# Altium PCB M2FS FLS Data Formatter 8_14_2012 centroid.PcbDoc (part 3 of 3)
Units mil, origin at the board's own origin, x right, y up, seen from the top; angles counter-clockwise.
Board outline 3350 x 3370 mil, 8 copper layers (Top Layer, Internal Plane 1, Mid-Layer 1, Mid-Layer 2, MidLayer3, Mid-Layer 4, Internal Plane 2, Bottom Layer); 141 components, 138 nets, 814 pads, 61 vias.
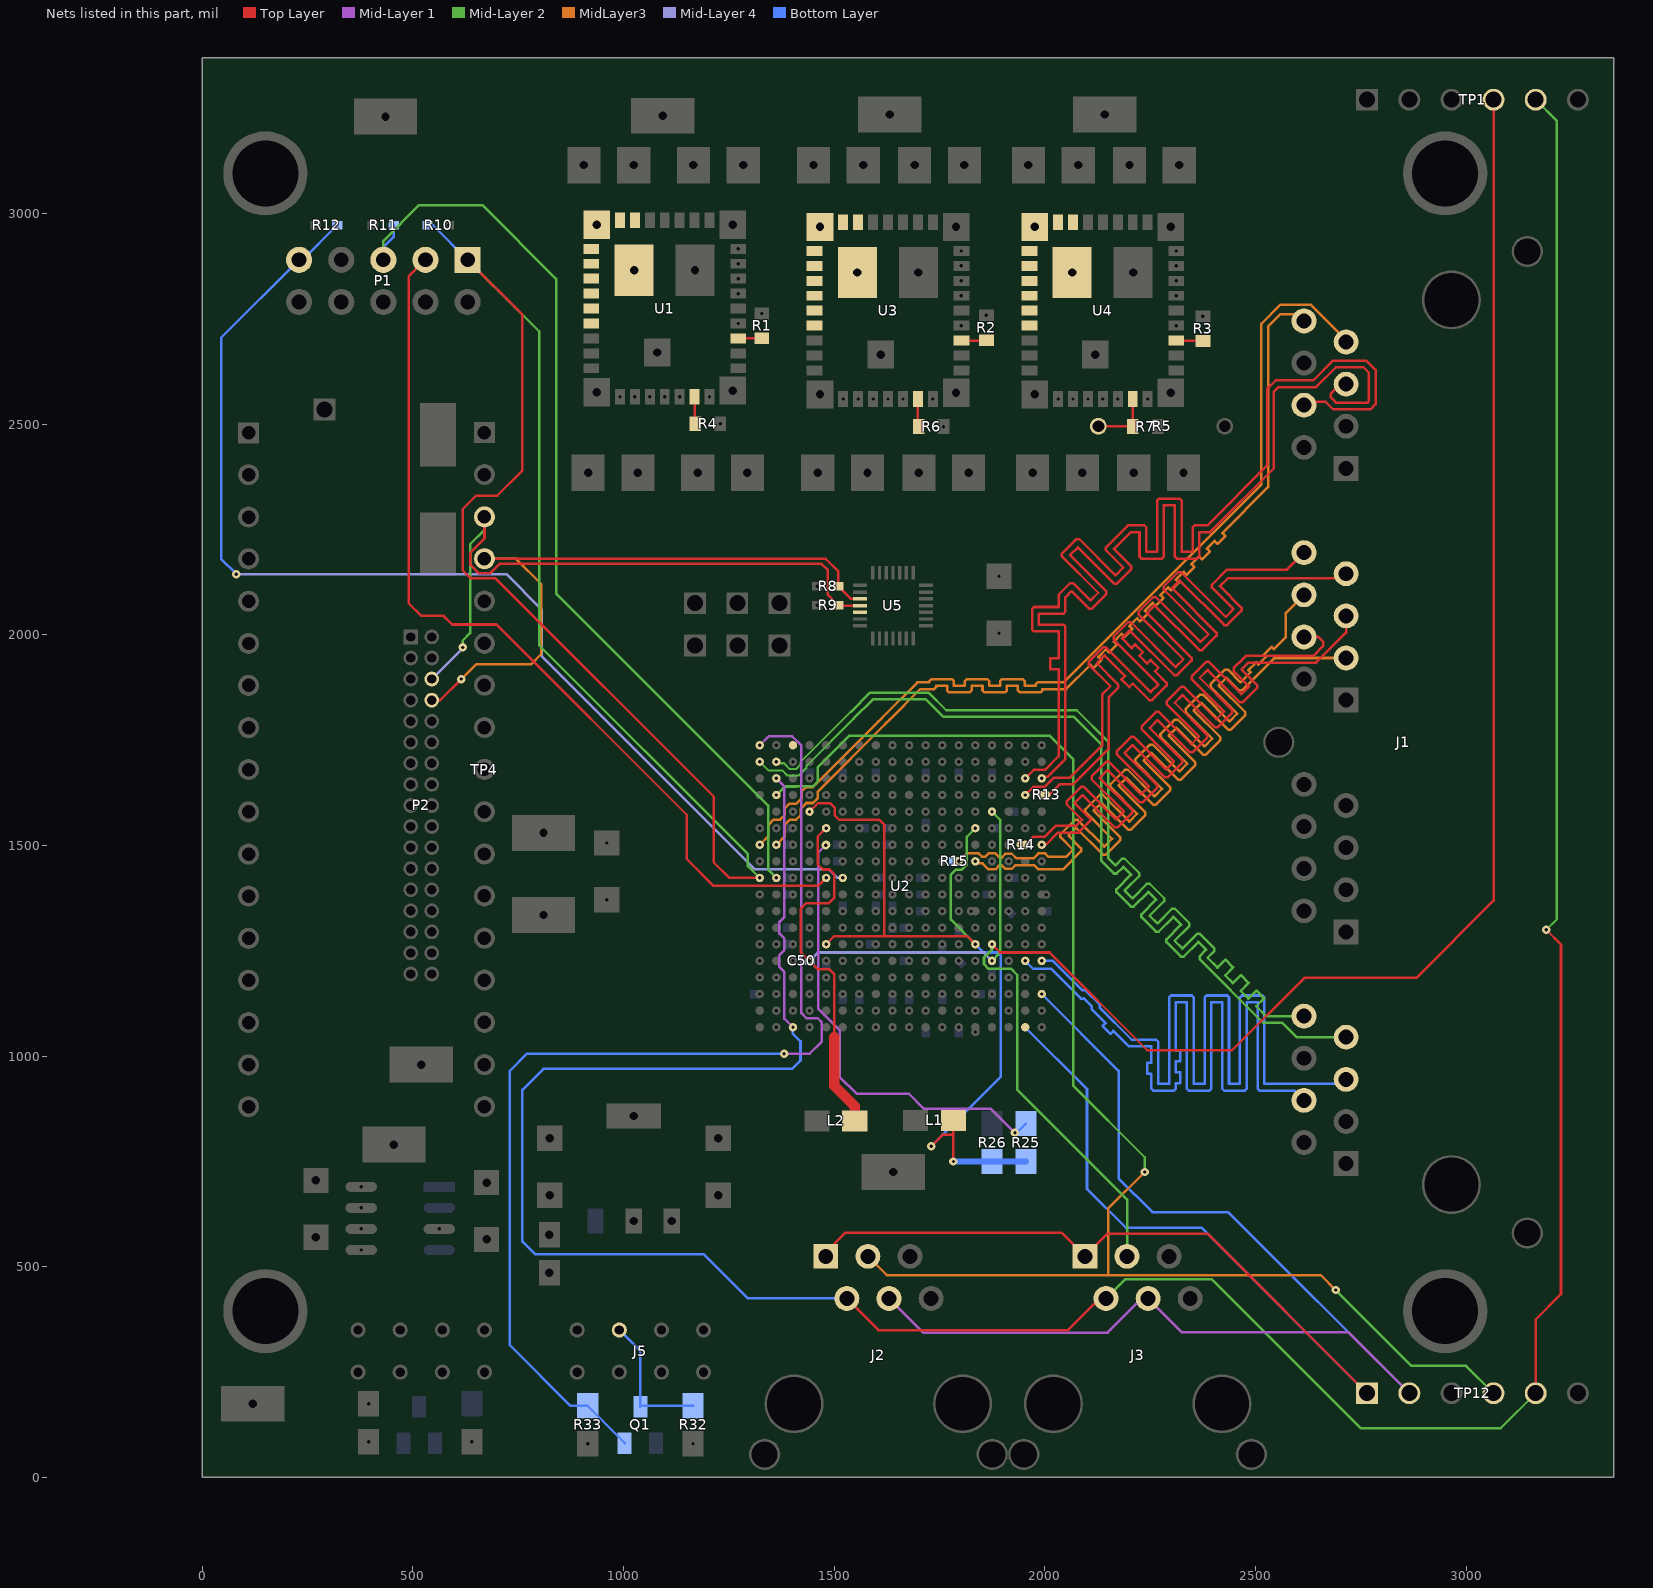
[diagram p9: the nets of this part, all layers, seen from the top]

## Via types
v1: diameter 20, hole 8, Top Layer to Bottom Layer, 60 vias
v2: diameter 20, hole 8, Top Layer to Bottom Layer, tented bottom, 1 vias

## Nets (pads, with @x,y where several pads share a name; then routed paths per layer and width w, separated by ;. In a path a pad name is that pad's centre, name@x,y a point inside that pad or via, vN(x,y) a via of type N, cw(c..) or ccw(c..) an arc to the next point about the centre after c; other vN are vias at no path point) (continued)
LVDS_CHANNEL_6_N: J1.C3 U2.H14 | length 2300.3
  MidLayer3 w6: U2.H14@1835.17,1462.37 1839.85,1457.68 1852.35,1457.68 1866.67,1443.37 1882.41,1443.37 1892.56,1453.53 1897.29,1453.53 1906.45,1444.37 1921.36,1444.37 1930.52,1453.53 1974.62,1453.53 1984.78,1443.37 2043,1443.37 2086.23,1486.6 2086.23,1493.23 2056.17,1523.29 2074.55,1541.67 2137.99,1478.24 2144.61,1478.24 2179,1512.62 2179,1519.25 2115.56,1582.69 2133.95,1601.07 2197.38,1537.63 2204.01,1537.63 2238.4,1572.02 2238.4,1578.65 2174.96,1642.08 2193.34,1660.47 2256.78,1597.03 2263.41,1597.03 2297.79,1631.42 2297.79,1638.04 2234.36,1701.48 2252.74,1719.86 2316.18,1656.43 2322.81,1656.43 2357.19,1690.81 2357.19,1697.44 2293.75,1760.88 2312.14,1779.26 2375.58,1715.82 2382.2,1715.82 2416.59,1750.21 2416.59,1756.84 2353.15,1820.27 2371.54,1838.66 2434.97,1775.22 2441.6,1775.22 2475.98,1809.61 2475.98,1816.23 2412.55,1879.67 2430.93,1898.06 2460.99,1867.99 2467.62,1867.99 2544.63,1945 J1.C3@2715,1945
LVDS_CHANNEL_6_P: J1.C6 R15.2 U2.H13 | length 2374
  MidLayer3 w6: U2.H13@1795.8,1462.37 1814.64,1481.21 1842.97,1481.21 1850.5,1473.68 1858.98,1473.68 1866.67,1481.37 1882.41,1481.37 1894.25,1469.53 1895.61,1469.53 1906.45,1480.37 1921.36,1480.37 1932.2,1469.53 1972.93,1469.53 1984.78,1481.37 2000.52,1481.37 2008.94,1472.94 2049.94,1472.94 2066.91,1489.91 2036.85,1519.98 2036.85,1526.6 2071.24,1560.99 2077.86,1560.99 2141.3,1497.55 2159.69,1515.94 2096.25,1579.37 2096.25,1586 2130.63,1620.38 2137.26,1620.38 2200.7,1556.95 2219.08,1575.33 2155.65,1638.77 2155.65,1645.4 2190.03,1679.78 2196.66,1679.78 2260.1,1616.34 2278.48,1634.73 2215.04,1698.17 2215.04,1704.79 2249.43,1739.18 2256.05,1739.18 2319.49,1675.74 2337.88,1694.13 2274.44,1757.56 2274.44,1764.19 2308.82,1798.58 2315.45,1798.58 2378.89,1735.14 2397.27,1753.52 2333.84,1816.96 2333.84,1823.59 2368.22,1857.97 2374.85,1857.97 2438.29,1794.54 2456.67,1812.92 2393.23,1876.36 2393.23,1882.98 2427.62,1917.37 2434.25,1917.37 2464.31,1887.31 2488.19,1911.19 2483.24,1916.14 2501.63,1934.53 2506.58,1929.58 2524.96,1947.96 2520.01,1952.91 2538.4,1971.3 2543.35,1966.35 2572,1995 2572,2052 J1.C6@2615,2095
  Bottom Layer w6: R15.2@1785.17,1462.37 U2.H13@1795.8,1462.37
LVDS_CHANNEL_7_N: J1.C5 U2.G18 | length 2294.7
  Top Layer w6: U2.G18@1992.65,1501.74 2002.55,1501.74 2031.3,1530.49 2080.12,1530.49 2107.43,1557.8 2107.43,1564.43 2070.69,1601.17 2089.07,1619.56 2165.87,1542.76 2172.5,1542.76 2206.88,1577.14 2206.88,1583.77 2130.08,1660.57 2148.47,1678.96 2225.27,1602.15 2231.9,1602.15 2266.28,1636.54 2266.28,1643.17 2189.48,1719.97 2207.86,1738.35 2284.67,1661.55 2291.29,1661.55 2325.68,1695.94 2325.68,1702.56 2248.88,1779.36 2267.26,1797.75 2344.06,1720.95 2350.69,1720.95 2385.08,1755.33 2385.08,1761.96 2308.27,1838.76 2326.66,1857.15 2403.46,1780.34 2410.09,1780.34 2444.47,1814.73 2444.47,1821.36 2367.67,1898.16 2386.06,1916.54 2462.86,1839.74 2469.48,1839.74 2503.87,1874.13 2503.87,1880.75 2467.13,1917.5 2483.63,1934 2644,1934 2715,2005 J1.C5@2715,2045
LVDS_CHANNEL_7_P: J1.C4 R14.2 U2.G17 | length 2297.8
  Top Layer w6: R14.2@1942.65,1501.74 U2.G17@1953.28,1501.74 1972.54,1521 2000,1521 2025.49,1546.49 2073.49,1546.49 2088.12,1561.12 2051.37,1597.86 2051.37,1604.49 2085.76,1638.87 2092.38,1638.87 2169.19,1562.07 2187.57,1580.46 2110.77,1657.26 2110.77,1663.88 2145.15,1698.27 2151.78,1698.27 2228.58,1621.47 2246.97,1639.85 2170.17,1716.65 2170.17,1723.28 2204.55,1757.67 2211.18,1757.67 2287.98,1680.86 2306.36,1699.25 2229.56,1776.05 2229.56,1782.68 2263.95,1817.06 2270.58,1817.06 2347.38,1740.26 2365.76,1758.65 2288.96,1835.45 2288.96,1842.08 2323.34,1876.46 2329.97,1876.46 2406.77,1799.66 2425.16,1818.04 2348.36,1894.84 2348.36,1901.47 2382.74,1935.86 2389.37,1935.86 2466.17,1859.06 2484.56,1877.44 2447.81,1914.18 2447.81,1920.81 2471.19,1944.19 2477,1950 2637.37,1950 2660.37,1973 2660.37,1984 2649.37,1995 J1.C4@2615,1995
LVDS_CHANNEL_8_N: J1.C7 R13.1 U2.D18 | length 2295.6
  Top Layer w6: U2.D18@1992.65,1619.85 R13.1@2003,1619.85 2010,1619.85 2035.15,1645 2066.63,1645 2152,1730.37 2152,1852 2174.63,1874.63 2174.63,1881.25 2123.21,1932.67 2141.6,1951.06 2190.23,1902.42 2181.89,1894.08 2200.27,1875.69 2208.61,1884.04 2247.74,1844.91 2254.37,1844.91 2288.75,1879.29 2288.75,1885.92 2261.18,1913.5 2269.52,1921.84 2251.14,1940.23 2242.79,1931.88 2224.41,1950.27 2232.75,1958.61 2214.37,1977 2206.02,1968.65 2182.61,1992.07 2200.99,2010.45 2307.14,1904.31 2313.77,1904.31 2348.15,1938.69 2348.15,1945.32 2242.01,2051.47 2260.39,2069.85 2366.54,1963.7 2373.16,1963.7 2407.55,1998.09 2407.55,2004.72 2301.4,2110.86 2319.79,2129.25 2425.93,2023.1 2432.56,2023.1 2466.95,2057.49 2466.95,2064.11 2415.53,2115.53 2434.31,2134.31 2704.31,2134.31 J1.C7@2715,2145
LVDS_CHANNEL_8_P: J1.C8 U2.D17 | length 2184.9
  Top Layer w6: U2.D17@1953.28,1619.85 1972.43,1639 1999.52,1639 2021.52,1661 2060,1661 2136,1737 2136,1858.63 2155.31,1877.94 2103.9,1929.36 2103.9,1935.98 2138.28,1970.37 2144.91,1970.37 2251.06,1864.22 2269.44,1882.61 2163.29,1988.75 2163.29,1995.38 2197.68,2029.77 2204.31,2029.77 2310.45,1923.62 2328.84,1942.01 2222.69,2048.15 2222.69,2054.78 2257.08,2089.16 2263.7,2089.16 2369.85,1983.02 2388.23,2001.4 2282.09,2107.55 2282.09,2114.18 2316.47,2148.56 2323.1,2148.56 2429.25,2042.41 2447.63,2060.8 2396.22,2112.22 2396.22,2118.84 2432.37,2155 2575,2155 J1.C8@2615,2195
NetJ1_3: 
NetJ1_4: 
NetJ1_5: 
NetJ1_6: 
NetJ3_3: 
NetJ3_4: 
NetJ3_5: 
NetJ3_6: 
NetL1_2: C50.1 L2.2 U2.E15 U2.F5 U2.P4 U2.P15 | length 1681
  Top Layer w6: U2.F5@1480.83,1541.11 1461,1521.28 1461,1455.33 1473.33,1443 1488.83,1443 1499.83,1432 1499.83,1375.76 1487.33,1363.26 1433.59,1363.26 1422.46,1352.13 1422.46,1351.37 1421.09,1350 1421.09,1246.52 U2.P4@1441.46,1226.15 1461.83,1205.78 1488.7,1205.78 1500,1194.48 1500,1045
  Top Layer w25: 1500,1045 1500,930 1549,881 L2.2@1549,846.31
  Mid-Layer 2 w6: U2.P15@1874.54,1226.15 1894,1245.61 1894,1561.02 U2.E15@1874.54,1580.48
  Mid-Layer 4 w6: U2.P4@1441.46,1226.15 1461.32,1246 1854.68,1246 U2.P15@1874.54,1226.15
NetL2_2: L1.2 R25.2 R26.2 U2.E4 U2.F14 U2.N5 U2.N14 | length 2110.7
  Top Layer w6: U2.E4@1441.46,1580.48 1460.98,1600 1491,1600 1501,1590 1501,1572 1512,1561 1607,1561 1619,1549 1619,1285.52 1620,1284.52 ; U2.N5@1480.83,1265.52 1499.83,1284.52 1620,1284.52 ; v1(1730,786) 1757,813 1782,813 1783,814 ; v1(1783,750) 1783,814 ; L1.2@1783,847.31 1783,814 ; U2.N14@1835.17,1265.52 1816.17,1284.52 1620,1284.52
  Mid-Layer 2 w6: U2.N14@1835.17,1265.52 1776.8,1323.89 1776.8,1430.87 1787.93,1442 1802.3,1442 1814.8,1454.5 1814.8,1520.74 U2.F14@1835.17,1541.11
  Bottom Layer w6: v1(1730,786) 1895,951 1895,1239 1888,1246 1854.68,1246 U2.N14@1835.17,1265.52
  Bottom Layer w15: v1(1783,750) R26.2@1875,750 R25.2@1955,750
NetR1_1: R4.1 U1.35 | length 64.5
  Top Layer w6: U1.35@1168.7,2564.8 1168.7,2502.77 R4.1@1170.47,2501
NetR2_1: R1.1 U1.4 | length 56
  Top Layer w6: U1.4@1272.05,2703.58 1327.89,2703.58 R1.1@1328,2703.47
NetR5_1: R6.1 U3.35 | length 66.5
  Top Layer w6: U3.35@1698.58,2559.69 1698.58,2495.89 R6.1@1700.47,2494
NetR6_1: R2.1 U3.4 | length 59.5
  Top Layer w6: U3.4@1801.93,2698.47 1859.99,2698.47 R2.1@1861,2699.47
NetR8_1: R3.1 U4.4 | length 63.5
  Top Layer w6: U4.4@2311.93,2698.47 2374.01,2698.47 R3.1@2375,2697.47
NetR9_1: R5.2 R7.1 U4.35 | length 147.6
  Top Layer w6: R5.2@2127,2495 2207.47,2495 R7.1@2208.47,2494 2208.58,2494.11 U4.35@2208.58,2559.69
NRESET: U5.24
nSTATUS: R25.1 U2.G5 | length 1086.1
  Top Layer w6: v1(1480,1501) 1480.09,1501 U2.G5@1480.83,1501.74
  Mid-Layer 1 w6: v1(1480,1501) 1461.83,1482.83 1461.83,1113.17 1513,1062 1513,951 1553,911 1677,911 1713,875 1872,875 v1(1929,818)
  Bottom Layer w6: v1(1929,818) 1933,818 R25.1@1955,840
PDWN: J2.2 J3.2 TP1.5 TP12.5 U2.C2 U2.V3 | length 7631.6
  Top Layer w6: J2.2@1530,425 1605,350 2055,350 J3.2@2145,440 ; TP12.5@3165,200 3165,375 3225,435 3225,1265 v1(3190,1300)
  Mid-Layer 1 w6: U2.C2@1362.72,1659.22 1382,1639.94 1382,1330.65 1369.96,1318.62 1369.96,1291.04 1382,1279 1382,1251.91 1369.96,1239.88 1369.96,1212.04 1382,1200 1382,1088.76 U2.V3@1402.09,1068.67
  Mid-Layer 2 w6: J3.2@2145,425 2191,471 2395.53,471 2749.53,117 3082,117 TP12.5@3165,200 ; TP1.5@3165,3270 3215,3220 3215,1325 v1(3190,1300)
  Bottom Layer w6: U2.V3@1402.09,1068.67 1402.09,1052.91 1420,1035 1420,990 1400,970 810,970 760,920 760,560 790,530 1190,530 1295,425 J2.2@1530,425
PH1: U1.17 U1.18 U1.19 U1.20 U1.21 U1.22 U1.23 U1.24 U1.25 U1.39
PH2: U3.17 U3.18 U3.19 U3.20 U3.21 U3.22 U3.23 U3.24 U3.25 U3.39
PH3: U4.17 U4.18 U4.19 U4.20 U4.21 U4.22 U4.23 U4.24 U4.25 U4.39
PLL_LOCK_A: J2.3 TP12.4 U2.D2 | length 3755.9
  Mid-Layer 2 w6: U2.D2@1362.72,1619.85 1382.87,1640 1410,1640 1410.22,1640.22 1449.33,1640.22 1460.46,1651.35 1460.46,1685 1535.46,1760 2012,1760 2067,1705 2067,930 2237,760 v1(2237,725) ; v1(2690,445) 2870,265 3000,265 TP12.4@3065,200
  MidLayer3 w6: J2.3@1580,525 1625,480 2150,480 ; v1(2237,725) 2150,638 2150,480 ; v1(2690,445) 2655,480 2150,480
PLL_LOCK_B: J3.3 TP1.4 U2.N15 | length 4248.2
  Top Layer w6: U2.N15@1874.54,1265.52 1894.05,1246 2011.05,1246 2243.05,1014 2444,1014 2616,1186 2882,1186 3065,1369 TP1.4@3065,3270
  Mid-Layer 2 w6: U2.N15@1874.54,1265.52 1874.54,1253.02 1855.54,1234.02 1855.54,1218.28 1866.67,1207.15 1920.41,1207.15 1934.28,1193.28 1934.28,920.72 2195,660 J3.3@2195,540
SCL: P2.8 R8.1 TP4.4 U5.26 | length 1582.4
  Top Layer w6: P2.8@545,1845 565,1845 v1(615,1895) ; v1(670,2180) TP4.4@670,2180.59 1479.41,2180.59 1510,2150 R8.1@1510,2115 1539.59,2085.41 U5.26@1561.43,2085.41
  MidLayer3 w6: v1(615,1895) 650,1930 780,1930 805,1955 805,2120 745,2180 v1(670,2180)
SDA: P2.6 R9.2 TP4.3 U5.25 | length 1582.5
  Top Layer w6: TP4.3@670,2280 670,2228.67 636,2194.67 636,2166.51 655.92,2146.59 684.08,2146.59 706.08,2168.59 1470,2168.59 1485,2153.59 1485,2095 R9.2@1510,2070 1510.59,2069.41 U5.25@1561.43,2069.41
  Mid-Layer 2 w6: v1(618,1970) 618,1986 636,2004 636,2215 670,2249 TP4.3@670,2280
  Mid-Layer 4 w6: P2.6@545,1895 618,1968 v1(618,1970)
START_A_N: J1.A7 U2.B1 | length 2332.9
  Mid-Layer 2 w5: U2.B1@1323.35,1698.59 1343.72,1678.22 1376.5,1678.22 1388.63,1666.09 1415.56,1666.09 1434.59,1685.13 1434.59,1689.59 1546.29,1801.29
  Mid-Layer 2 w6: 1546.29,1801.29 1592,1847 1717.37,1847 1759.37,1805 2069,1805 2134,1740 2134,1463.37 2163.88,1433.49 2170.51,1433.49 2186.28,1449.27 2204.67,1430.89 2169.8,1396.02 2169.8,1389.39 2204.18,1355.01 2210.81,1355.01 2245.68,1389.88 2264.07,1371.49 2229.2,1336.62 2229.2,1329.99 2263.58,1295.61 2270.21,1295.61 2305.08,1330.48 2323.46,1312.09 2288.59,1277.22 2288.59,1270.6 2322.98,1236.21 2329.61,1236.21 2364.48,1271.08 2382.86,1252.7 2367.08,1236.92 2367.08,1230.29 2518.37,1079 2563.63,1079 2597.63,1045 J1.A7@2715,1045
START_A_P: J1.A8 U2.B2 | length 2334.1
  Mid-Layer 2 w5: U2.B2@1362.72,1698.59 1366.2,1695.11 1380.82,1695.11 1394.85,1681.09 1409.34,1681.09 1419.59,1691.34 1419.59,1697.22 1539.37,1817
  Mid-Layer 2 w6: 1539.37,1817 1585.37,1863 1724,1863 1766,1821 2075.63,1821 2150,1746.63 2150,1470 2167.19,1452.81 2182.97,1468.59 2189.6,1468.59 2223.98,1434.2 2223.98,1427.57 2189.11,1392.7 2207.5,1374.32 2242.37,1409.19 2248.99,1409.19 2283.38,1374.8 2283.38,1368.18 2248.51,1333.31 2266.89,1314.92 2301.76,1349.79 2308.39,1349.79 2342.78,1315.41 2342.78,1308.78 2307.91,1273.91 2326.29,1255.52 2361.16,1290.39 2367.79,1290.39 2402.17,1256.01 2402.17,1249.38 2386.4,1233.6 2409.69,1210.31 2428.5,1229.12 2446.89,1210.73 2428.08,1191.92 2446.46,1173.54 2465.27,1192.35 2483.66,1173.96 2464.85,1155.15 2483.23,1136.77 2502.04,1155.58 2520.43,1137.19 2501.62,1118.38 2525,1095 J1.A8@2615,1095
START_B_N: J1.D7 U2.G1 | length 2300.1
  MidLayer3 w6: U2.G1@1325.61,1506.11 1323.35,1506.11 U2.G1@1323.35,1501.74 1343.72,1522.11 1343.72,1548.98 1355.92,1561.18 1371.78,1561.18 1383.09,1572.49 1383.09,1588.35 1394.22,1599.48 1410.09,1599.48 1422.46,1611.86 1422.46,1627.72 1433.59,1638.85 1449.45,1638.85 1605,1794.4 1605,1794.5 1625.5,1815 1625.6,1815 1697.6,1887 1726,1887 1726,1890.06 1730.69,1894.75 1779.31,1894.75 1784,1890.06 1784,1879.25 1810,1879.25 1810,1890.06 1814.69,1894.75 1863.31,1894.75 1868,1890.06 1868,1879.25 1894,1879.25 1894,1890.06 1898.69,1894.75 1947.31,1894.75 1952,1890.06 1952,1879.25 1978,1879.25 1978,1882.31 1982.69,1887 2044,1887 2514,2357 2514,2738.35 2559.17,2783.53 2630.96,2783.53 2715,2699.49 J1.D7@2715,2695
START_B_P: J1.D8 U2.G2 | length 2295.4
  MidLayer3 w6: U2.G2@1362.72,1501.74 1383.09,1522.11 1383.09,1549.86 1394.71,1561.48 1409.96,1561.48 1421.09,1572.61 1421.09,1587.86 1434.08,1600.85 1449.33,1600.85 1460.46,1611.98 1460.46,1627.23 1621,1787.77 1621,1787.87 1632.13,1799 1632.23,1799 1704.23,1871 1737.31,1871 1742,1875.69 1742,1878.75 1768,1878.75 1768,1867.94 1772.69,1863.25 1821.31,1863.25 1826,1867.94 1826,1878.75 1852,1878.75 1852,1867.94 1856.69,1863.25 1905.31,1863.25 1910,1867.94 1910,1878.75 1936,1878.75 1936,1867.94 1940.69,1863.25 1989.31,1863.25 1994,1867.94 1994,1871 2050.63,1871 2108.58,1928.95 2115.79,1921.74 2134.17,1940.12 2126.96,1947.33 2145.35,1965.72 2152.56,1958.51 2170.94,1976.89 2163.73,1984.1 2182.12,2002.49 2189.33,1995.28 2207.71,2013.66 2200.5,2020.87 2218.89,2039.26 2226.1,2032.05 2244.48,2050.43 2237.27,2057.64 2255.66,2076.03 2262.87,2068.82 2281.25,2087.2 2274.04,2094.41 2292.42,2112.8 2299.64,2105.59 2318.02,2123.97 2310.81,2131.18 2329.19,2149.57 2336.41,2142.35 2354.79,2160.74 2347.58,2167.95 2365.96,2186.34 2373.18,2179.12 2391.56,2197.51 2384.35,2204.72 2402.73,2223.11 2409.95,2215.89 2428.33,2234.28 2421.12,2241.49 2530,2350.37 2530,2731.73 2559.24,2760.97 2599.03,2760.97 J1.D8@2615,2745
SYS_CLK1_N: J1.A5 U2.P18 | length 2154.7
  Bottom Layer w6: U2.P18@1992.65,1226.15 2019,1226.15 2089.03,1156.12 2089.25,1156.34 2095.88,1156.34 2130.26,1121.96 2130.26,1115.33 2130.04,1115.11 2206.15,1039 2264.31,1039 2269,1034.31 2269,934 2295,934 2295,1139.31 2299.68,1144 2348.31,1144 2353,1139.31 2353,934 2379,934 2379,1139.31 2383.68,1144 2432.31,1144 2437,1139.31 2437,934 2463,934 2463,1139.31 2467.68,1144 2516.31,1144 2521,1139.31 2521,934 2704,934 J1.A5@2715,945
SYS_CLK1_P: J1.A4 U2.P17 | length 2185.7
  Bottom Layer w6: U2.P17@1953.28,1226.15 1972.42,1207 2015.52,1207 2085.71,1136.81 2092.34,1136.81 2092.56,1137.03 2110.95,1118.64 2110.73,1118.42 2110.73,1111.8 2144.1,1078.42 2137.03,1071.35 2155.41,1052.97 2162.48,1060.04 2199.52,1023 2253,1023 2253,984 2243,984 2243,958 2253,958 2253,922.69 2257.68,918 2306.31,918 2311,922.69 2311,935.69 2321,935.69 2321,961.69 2311,961.69 2311,987.69 2321,987.69 2321,1013.69 2311,1013.69 2311,1128 2337,1128 2337,922.69 2341.68,918 2390.31,918 2395,922.69 2395,1128 2421,1128 2421,922.69 2425.68,918 2474.31,918 2479,922.69 2479,1128 2505,1128 2505,922.69 2509.68,918 2592,918 J1.A4@2615,895
SYS_CLK2_N: J1.D5 U2.C18 | length 2594.5
  Top Layer w6: U2.C18@1992.65,1659.22 1997.02,1663.59 2007.14,1663.59 2048.93,1705.37 2048.93,2019.31 2044.24,2024 1985.73,2024 1985.73,2050 2044.24,2050 2048.93,2054.69 2048.93,2088.93 2063.55,2103.55 2104.93,2062.18 2111.56,2062.18 2145.94,2096.56 2145.94,2103.19 2059.88,2189.25 2078.26,2207.64 2164.33,2121.57 2170.95,2121.57 2205.34,2155.96 2205.34,2162.59 2163.96,2203.96 2203.92,2243.92 2224.61,2243.92 2224.61,2185.41 2229.3,2180.72 2277.92,2180.72 2282.61,2185.41 2282.61,2307.12 2308.61,2307.12 2308.61,2185.41 2313.3,2180.72 2361.92,2180.72 2366.61,2185.41 2366.61,2243.92 2392.18,2243.92 2543.63,2395.38 2543.63,2577 2554.63,2588 2643.63,2588 2690.63,2635 2756,2635 2769,2622 2769,2554 2766,2551 2691,2551 2678,2564 2678,2572 2701,2595 J1.D5@2715,2595
SYS_CLK2_P: J1.D4 U2.C17 | length 2748.1
  Top Layer w6: U2.C17@1953.28,1659.22 1973.65,1679.59 2000.52,1679.59 2032.93,1712 2032.93,1918 2012.43,1918 2012.43,1944 2032.93,1944 2032.93,2008 1974.41,2008 1969.73,2012.69 1969.73,2061.31 1974.41,2066 2032.93,2066 2032.93,2095.55 2060.24,2122.87 2066.87,2122.87 2108.24,2081.49 2126.63,2099.88 2040.56,2185.94 2040.56,2192.57 2074.95,2226.95 2081.57,2226.95 2167.64,2140.89 2186.02,2159.27 2144.65,2200.65 2144.65,2207.28 2197.3,2259.92 2235.92,2259.92 2240.61,2255.24 2240.61,2196.72 2266.61,2196.72 2266.61,2318.44 2271.3,2323.12 2319.92,2323.12 2324.61,2318.44 2324.61,2196.72 2350.61,2196.72 2350.61,2255.24 2355.3,2259.92 2385.55,2259.92 2527.63,2402 2527.63,2583.63 2548,2604 2637,2604 2684,2651 2762.63,2651 2785,2628.63 2785,2547.37 2772.63,2535 2684.37,2535 2666.69,2552.69 2622.68,2552.69 J1.D4@2615,2545
T18: J2.4 J3.4 TP12.2 U2.T18 | length 2815.7
  Mid-Layer 1 w6: J2.4@1630,425 1711,344 2149,344 J3.4@2245,440 ; J3.4@2245,425 2325.5,344.5 2720.5,344.5 TP12.2@2865,200
  Bottom Layer w6: U2.T18@1992.65,1147.41 2175,965.05 2175,710 2255,630 2435,630 TP12.2@2865,200
TCK: P1.1 R10.2 U2.J1 | length 3861
  Top Layer w6: P1.1@630,2890 760,2760 760,2390 700,2330 650,2330 618,2298 618,2153.25 636.66,2134.59 695.41,2134.59 1214.18,1615.82 1214.18,1460 1251.18,1423 U2.J1@1323.35,1423
  Mid-Layer 2 w6: P1.1@630,2890 800,2720 800,1975 1295,1480 1295,1451.35 U2.J1@1323.35,1423
  Bottom Layer w6: R10.2@535,2972 548,2972 P1.1@630,2890
TDI: P1.9 R12.2 U2.J6 | length 2764.4
  Mid-Layer 4 w6: v1(81,2144) 722,2144 805.5,2060.5 805.5,1949.5 1311.63,1443.37 1487.33,1443.37 1507.7,1423 U2.J6@1520.2,1423
  Bottom Layer w6: v1(81,2144) 45,2180 45,2705 P1.9@230,2890 238,2890 R12.2@320,2972
TDO: P1.3 U2.J5 | length 2169.7
  Top Layer w6: P1.3@530,2890 490,2850 490,2075 520,2045 573,2045 593.5,2024.5 698.5,2024.5 1150,1573 1150,1468 1214,1404 1461.83,1404 U2.J5@1480.83,1423
TMS: P1.5 R11.2 U2.J2 | length 2293.6
  Mid-Layer 2 w6: P1.5@430,2890 430,2935 515,3020 665,3020 840,2845 840,2098 1343,1595 1343,1442.72 U2.J2@1362.72,1423
  Bottom Layer w6: P1.5@430,2890 430,2920 455,2945 R11.2@455,2972
V17: J2.1 J3.1 TP12.1 U2.V17 | length 2826.4
  Top Layer w6: J2.1@1480,525 1480,534 1527,581 2039,581 J3.1@2095,525 2149,579 2386,579 TP12.1@2765,200
  Bottom Layer w6: U2.V17@1953.28,1068.67 2100,921.94 2100,685 2192,593 2372,593 TP12.1@2765,200
Vs: U2.A3
Vsyn: J5.6 Q1.3 R32.2 | length 328.1
  Bottom Layer w6: J5.6@990,350 1040,300 Q1.3@1040,168.31 1041.69,170 R32.2@1165,170
Vsync: Q1.2 R33.2 U2.A1 | length 2644.3
  Mid-Layer 1 w6: U2.A1@1323.35,1737.96 1344.39,1759 1400.5,1759 1422,1737.5 1422,1102.05 1434.01,1090.04 1460.96,1090.04 1470,1081 1470,1034 1442,1006 v1(1381,1006)
  Bottom Layer w6: Q1.2@1002.6,81.69 1002.6,82.4 R33.2@915,170 874,170 730,314 730,965 771,1006 v1(1381,1006)
pads on no net: J1.MH1 J1.MH2 J1.MH3 J1.MH4 J1.MH5 J2.MH1 J2.MH2 J2.MH3 J2.MH4 J3.MH1 J3.MH2 J3.MH3 J3.MH4 J4.1 J4.4 J4.5 J4.8 J5.1 J5.4 J5.5 J5.8 P1.6 P1.7 P1.8 U1.2 U1.3 U1.6 U1.15 U1.16 U1.26 U1.27 U1.28 U2.A4 U2.A8 U2.A10 U2.A11 U2.A13 U2.B4 U2.B5 U2.B7 U2.B15 U2.B16 U2.B18 U2.C1 U2.C3 U2.C5 U2.C10 U2.D1 U2.D3 U2.D10 U2.E1 U2.E2 U2.E16 U2.E17 U2.E18 U2.G14 U2.H2 U2.H4 U2.H5 U2.H17 U2.K5 U2.K6 U2.L1 U2.L2 U2.L3 U2.L4 U2.L5 U2.M2 U2.M5 U2.P1 U2.P5 U2.P9 U2.P12 U2.R3 U2.R4 U2.R8 U2.R11 U2.R13 U2.T3 U2.T8 U2.T17 U2.U1 U2.U5 U2.U6 U2.U12 U2.U15 U2.U17 U2.V1 U2.V5 U2.V6 U2.V15 U2.V16 U3.2 U3.3 U3.6 U3.7 U3.15 U3.16 U3.26 U3.27 U3.28 U4.2 U4.3 U4.6 U4.15 U4.16 U4.26 U4.27 U4.28 U5.10 U5.11 U6.4

## Polygon pours and split planes (outlines as drawn)
1V2 on Multi-Layer "1V2" (solid, remove dead copper, pour order 107): 3353.06,3373.06 3354.33,3370 3354.33,0 3353.06,-3.06 3350,-4.33 0,-4.33 -3.06,-3.06 -4.33,0 -4.33,3370 -3.06,3373.06 0,3374.33 3350,3374.33
GND on Mid-Layer 4 "U2 Core GND" (solid, remove dead copper, pour order 56): 1759.49,1504.8 1760.76,1501.74 1760.76,1304.89 1759.49,1301.83 1756.43,1300.56 1559.57,1300.56 1556.51,1301.83 1555.24,1304.89 1555.24,1501.74 1556.51,1504.8 1559.57,1506.07 1756.43,1506.07
PH3 on Mid-Layer 4 "PH3" (solid, remove dead copper, pour order 71): 1915,2715 2000,2715 2000,2745 2025,2770 2130,2770 2130,2965 2085,2965 2085,3020 1915,3020
1V8 on Mid-Layer 4 "1V8" (solid, remove dead copper, pour order 100): 3353.06,3373.06 3354.33,3370 3354.33,0 3353.06,-3.06 3350,-4.33 0,-4.33 -3.06,-3.06 -4.33,0 -4.33,3370 -3.06,3373.06 0,3374.33 3350,3374.33
PH2 on Mid-Layer 4 "PH2" (solid, remove dead copper, pour order 70): 1405,2715 1490,2715 1490,2745 1515,2770 1620,2770 1620,2965 1575,2965 1575,3020 1405,3020
PH1 on Mid-Layer 4 "PH1" (solid, remove dead copper, pour order 69): 875.12,2720.12 960.12,2720.12 960.12,2750.12 985.12,2775.12 1090.12,2775.12 1090.12,2970.12 1045.12,2970.12 1045.12,3025.12 875.12,3025.12
1V8 on Mid-Layer 4 "1V8" (solid, pour order 96): 1620,2770 1770,2770 1770,2825 1840,2825 1840,3060 1750,3060 1750,3320 1505,3320 1505,3035 1645,3035 1645,2950 1620,2950.28
2V5 on Mid-Layer 4 "2V5" (solid, pour order 97): 2130,2770 2280,2770 2280,2825 2350,2825 2350,3060 2260,3060 2260,3320 2015,3320 2015,3035 2155,3035 2155,2950 2130,2950.28
1V2 on Mid-Layer 4 "1V2" (solid, remove dead copper, pour order 95): 1223.18,3328.18 1224.45,3325.12 1224.45,3069.45 1310.12,3069.45 1313.18,3068.18 1314.45,3065.12 1314.45,2830.12 1313.18,2827.06 1310.12,2825.79 1244.45,2825.79 1244.45,2775.12 1243.78,2773.51 1243.18,2772.06 1241.62,2771.41 1240.12,2770.79 1100,2770.67 1098.49,2771.3 1096.94,2771.94 1096.3,2773.48 1095.67,2775 1095.67,2955 1096.3,2956.52 1096.91,2958.04 1096.93,2958.04 1096.94,2958.06 1098.45,2958.69 1099.97,2959.33 1110.79,2959.41 1110.79,3035.79 975.12,3035.79 972.06,3037.06 970.79,3040.12 970.79,3325.12 972.06,3328.18 975.12,3329.45 1220.12,3329.45
AGND on Mid-Layer 4 "AGND" (solid, remove dead copper, pour order 98): 775,920 775,545 1300,545 1300,620 2000,620 2000,820 1855,820 1855,895 1600,895 1600,795 1300,795 1300,920
GND on Mid-Layer 1 "U2 Core GND" (solid, remove dead copper, pour order 54): 1559.57,1304.89 1559.57,1501.74 1756.43,1501.74 1756.43,1304.89 1559.57,1304.89
PH3 on Mid-Layer 1 "PH3" (solid, pour order 64): 1915,2715 2000,2715 2000,2745 2025,2770 2130,2770 2130,2965 2085,2965 2085,3020 1915,3020
GND on Mid-Layer 1 "GND" (solid, remove dead copper, pour order 84): 3353.06,3373.06 3354.33,3370 3354.33,0 3353.06,-3.06 3350,-4.33 0,-4.33 -3.06,-3.06 -4.33,0 -4.33,3370 -3.06,3373.06 0,3374.33 3350,3374.33
PH2 on Mid-Layer 1 "PH2" (solid, pour order 61): 1405,2715 1490,2715 1490,2745 1515,2770 1620,2770 1620,2965 1575,2965 1575,3020 1405,3020
PH1 on Mid-Layer 1 "PH1" (solid, pour order 58): 875.12,2720.12 960.12,2720.12 960.12,2750.12 985.12,2775.12 1090.12,2775.12 1090.12,2970.12 1045.12,2970.12 1045.12,3025.12 875.12,3025.12
1V8 on Mid-Layer 1 "1V8" (solid, pour order 81): 1620,2770 1770,2770 1770,2825 1840,2825 1840,3060 1750,3060 1750,3320 1505,3320 1505,3035 1645,3035 1645,2950 1620,2950.28
2V5 on Mid-Layer 1 "2V5" (solid, pour order 82): 2130,2770 2280,2770 2280,2825 2350,2825 2350,3060 2260,3060 2260,3320 2015,3320 2015,3035 2155,3035 2155,2950 2130,2950.28
1V2 on Mid-Layer 1 "1V2" (solid, remove dead copper, pour order 80): 1100,2775 1240.12,2775.12 1240.12,2830.12 1310.12,2830.12 1310.12,3065.12 1220.12,3065.12 1220.12,3325.12 975.12,3325.12 975.12,3040.12 1115.12,3040.12 1115.12,2955.12 1100,2955
2V5_VCCA on Mid-Layer 1 "2V5_VCCA" (solid, remove dead copper, pour order 83): 775,920 775,545 1300,545 1300,620 2000,620 2000,820 1855,820 1855,895 1600,895 1600,795 1300,795 1300,920
GND on Mid-Layer 2 "U2 Core GND" (solid, remove dead copper, pour order 55): 1559.57,1304.89 1559.57,1501.74 1756.43,1501.74 1756.43,1304.89 1559.57,1304.89
PH3 on Mid-Layer 2 "PH3" (solid, remove dead copper, pour order 65): 1915,2715 2000,2715 2000,2745 2025,2770 2130,2770 2130,2965 2085,2965 2085,3020 1915,3020
2V5 on Mid-Layer 2 "2V5" (solid, remove dead copper, pour order 89): 0,0 0,3370 3350,3370 3350,0 0,0
PH2 on Mid-Layer 2 "PH2" (solid, remove dead copper, pour order 62): 1405,2715 1490,2715 1490,2745 1515,2770 1620,2770 1620,2965 1575,2965 1575,3020 1405,3020
PH1 on Mid-Layer 2 "PH1" (solid, remove dead copper, pour order 59): 875.12,2720.12 960.12,2720.12 960.12,2750.12 985.12,2775.12 1090.12,2775.12 1090.12,2970.12 1045.12,2970.12 1045.12,3025.12 875.12,3025.12
1V8 on Mid-Layer 2 "1V8" (solid, pour order 86): 1620,2770 1770,2770 1770,2825 1840,2825 1840,3060 1750,3060 1750,3320 1505,3320 1505,3035 1645,3035 1645,2950 1620,2950.28
2V5 on Mid-Layer 2 "2V5" (solid, pour order 87): 2130,2770 2280,2770 2280,2825 2350,2825 2350,3060 2260,3060 2260,3320 2015,3320 2015,3035 2155,3035 2155,2950 2130,2950.28
1V2 on Mid-Layer 2 "1V2" (solid, remove dead copper, pour order 85): 1100,2775 1240.12,2775.12 1240.12,2830.12 1310.12,2830.12 1310.12,3065.12 1220.12,3065.12 1220.12,3325.12 975.12,3325.12 975.12,3040.12 1115.12,3040.12 1115.12,2955.12 1100,2955
AGND on Mid-Layer 2 "AGND" (solid, remove dead copper, pour order 88): 775,920 775,545 1300,545 1300,620 2000,620 2000,820 1855,820 1855,895 1600,895 1600,795 1300,795 1300,920
1V2 on Bottom Layer "1V2" (solid, remove dead copper, pour order 99): 3353.06,3373.06 3354.33,3370 3354.33,0 3353.06,-3.06 3350,-4.33 0,-4.33 -3.06,-3.06 -4.33,0 -4.33,3370 -3.06,3373.06 0,3374.33 3350,3374.33
GND on Bottom Layer "U2 Core GND" (solid, remove dead copper, pour order 53): 1559.57,1304.89 1559.57,1501.74 1756.43,1501.74 1756.43,1304.89 1559.57,1304.89
PH3 on Bottom Layer "PH3" (solid, remove dead copper, pour order 74): 1915,2715 2000,2715 2000,2745 2025,2770 2130,2770 2130,2965 2085,2965 2085,3020 1915,3020
PH2 on Bottom Layer "PH2" (solid, remove dead copper, pour order 73): 1405,2715 1490,2715 1490,2745 1515,2770 1620,2770 1620,2965 1575,2965 1575,3020 1405,3020
PH1 on Bottom Layer "PH1" (solid, remove dead copper, pour order 72): 875.12,2720.12 960.12,2720.12 960.12,2750.12 985.12,2775.12 1090.12,2775.12 1090.12,2970.12 1045.12,2970.12 1045.12,3025.12 875.12,3025.12
1V8 on Bottom Layer "1V8" (solid, pour order 101): 1620,2770 1770,2770 1770,2825 1840,2825 1840,3060 1750,3060 1750,3320 1505,3320 1505,3035 1645,3035 1645,2950 1620,2950.28
2V5 on Bottom Layer "2V5" (solid, pour order 102): 2130,2770 2280,2770 2280,2825 2350,2825 2350,3060 2260,3060 2260,3320 2015,3320 2015,3035 2155,3035 2155,2950 2130,2950.28
2V5_VCCA on Bottom Layer "2V5_VCCA" (solid, remove dead copper, pour order 103): 775,920 775,545 1300,545 1300,620 2000,620 2000,820 1855,820 1855,895 1600,895 1600,795 1300,795 1300,920
PH3 on MidLayer3 "PH3" (solid, remove dead copper, pour order 68): 1915,2715 2000,2715 2000,2745 2025,2770 2130,2770 2130,2965 2085,2965 2085,3020 1915,3020
GND on MidLayer3 "GND" (solid, remove dead copper, pour order 94): 3353.06,3373.06 3354.33,3370 3354.33,0 3353.06,-3.06 3350,-4.33 0,-4.33 -3.06,-3.06 -4.33,0 -4.33,3370 -3.06,3373.06 0,3374.33 3350,3374.33
PH2 on MidLayer3 "PH2" (solid, remove dead copper, pour order 67): 1405,2715 1490,2715 1490,2745 1515,2770 1620,2770 1620,2965 1575,2965 1575,3020 1405,3020
PH1 on MidLayer3 "PH1" (solid, remove dead copper, pour order 66): 875.12,2720.12 960.12,2720.12 960.12,2750.12 985.12,2775.12 1090.12,2775.12 1090.12,2970.12 1045.12,2970.12 1045.12,3025.12 875.12,3025.12
1V8 on MidLayer3 "1V8" (solid, pour order 91): 1620,2770 1770,2770 1770,2825 1840,2825 1840,3060 1750,3060 1750,3320 1505,3320 1505,3035 1645,3035 1645,2950 1620,2950.28
2V5 on MidLayer3 "2V5" (solid, pour order 92): 2130,2770 2280,2770 2280,2825 2350,2825 2350,3060 2260,3060 2260,3320 2015,3320 2015,3035 2155,3035 2155,2950 2130,2950.28
1V2 on MidLayer3 "1V2" (solid, remove dead copper, pour order 90): 1100,2775 1240.12,2775.12 1240.12,2830.12 1310.12,2830.12 1310.12,3065.12 1220.12,3065.12 1220.12,3325.12 975.12,3325.12 975.12,3040.12 1115.12,3040.12 1115.12,2955.12 1100,2955
2V5_VCCA on MidLayer3 "2V5_VCCA" (solid, remove dead copper, pour order 93): 775,920 775,545 1300,545 1300,620 2000,620 2000,820 1855,820 1855,895 1600,895 1600,795 1300,795 1300,920
GND on Top Layer "GND" (solid, remove dead copper, pour order 79): 3353.06,3373.06 3354.33,3370 3354.33,0 3353.06,-3.06 3350,-4.33 0,-4.33 -3.06,-3.06 -4.33,0 -4.33,3370 -3.06,3373.06 0,3374.33 3350,3374.33
PH3 on Top Layer "PH3" (solid, pour order 63): 1915,2715 2000,2715 2000,2745 2025,2770 2130,2770 2130,2965 2085,2965 2085,3020 1915,3020
PH2 on Top Layer "PH2" (solid, remove dead copper, pour order 60): 1405,2715 1490,2715 1490,2745 1515,2770 1620,2770 1620,2965 1575,2965 1575,3020 1405,3020
PH1 on Top Layer "PH1" (solid, remove dead copper, pour order 57): 875.12,2720.12 960.12,2720.12 960.12,2750.12 985.12,2775.12 1090.12,2775.12 1090.12,2970.12 1045.12,2970.12 1045.12,3025.12 875.12,3025.12
1V8 on Top Layer "1V8" (solid, pour order 76): 1620,2770 1770,2770 1770,2825 1840,2825 1840,3060 1750,3060 1750,3320 1505,3320 1505,3035 1645,3035 1645,2950 1620,2950.28
2V5 on Top Layer "2V5" (solid, pour order 77): 2130,2770 2280,2770 2280,2825 2350,2825 2350,3060 2260,3060 2260,3320 2015,3320 2015,3035 2155,3035 2155,2950 2130,2950.28
1V2 on Top Layer "1V2" (solid, pour order 75): 1100,2775 1240.12,2775.12 1240.12,2830.12 1310.12,2830.12 1310.12,3065.12 1220.12,3065.12 1220.12,3325.12 975.12,3325.12 975.12,3040.12 1115.12,3040.12 1115.12,2955.12 1100,2955
AGND on Top Layer "AGND" (solid, remove dead copper, pour order 78): 775,920 775,545 1300,545 1300,620 2000,620 2000,820 1855,820 1855,895 1600,895 1600,795 1300,795 1300,920
5V0 on Internal Plane 1 (split plane): 3329.9,20.1 20.1,20.1 20.1,3349.9 3329.9,3349.9
GND on Internal Plane 2 (split plane): 3329.9,20.1 20.1,20.1 20.1,3349.9 3329.9,3349.9

## Keep-outs
Keep-Out Layer:
  lines w18: 0,0 0,3375 3,3372 3351,3372 3352,3371 3352,-2 3350,0 0,0

## Other copper
Top Layer:
  text "GND" at 95,3240 h60
Mid-Layer 1:
  text "GND" at 95,3240 h60
Mid-Layer 2:
  text "2V5" at 95,3240 h60
MidLayer3:
  text "GND" at 95,3240 h60
Mid-Layer 4:
  text "1V8" at 95,3240 h60
Bottom Layer:
  text "1V2" at 255,3240 h60

## Silkscreen, mask and mechanical layers (free items; w line width, h text height)
Top Overlay:
  lines w5: 862,500 1290,500
  lines w6: 2630,270 2630,235 2730,235 ; 2630,3185 2645,3200 2715,3200 2750,3200 ; 2780,3085 2865,3170 2940,3245 ; 2785,3180 2845,3240 ; 2820,280 2855,280 2860,275 2860,235 ; 2825,335 2865,295 2940,220 ; 2925,220 2940,220 ; 2930,3245 2940,3245 ; 2940,235 2940,220 ; 2940,3235 2940,3245 ; 2750,3200 2765,3215 ; 2750,3200 2765,3215 ; 2750,3200 2765,3215 ; 2765,3215 2765,3235 2765,3215
  lines w7.87: 1283.98,1029.3 1283.98,1360.98 ; 1283.98,1393.02 1283.98,1777.33 1408.67,1777.33 1409,1777 ; 1440,1777 1545,1777 ; 1574,1777 1629,1777 ; 1654,1777 1667,1777 ; 1692,1777 2031.69,1777 2032.02,1777.33
  lines w8: 180,2940 385,2940 385,2930 474,2930 ; 475,2930 475,2940 680,2940
  lines w10: -295.99,60 -275.99,0 ; -295.99,3310 -275.99,3370 ; -285.99,0 -265.99,0 ; -285.99,3370 -265.99,3370 ; -275.99,1404.09 -275.99,0 ; -275.99,1965.91 -275.99,3370 ; -255.99,60 -275.99,0 ; -255.99,3310 -275.99,3370 ; 0,-124.01 0,-104.01 ; 60,-134.01 0,-114.01 ; 60,-94.01 0,-114.01 ; 1394.09,-114.01 0,-114.01 ; 1955.91,-114.01 3350,-114.01 ; 3290,-134.01 3350,-114.01 ; 3290,-94.01 3350,-114.01 ; 3350,-124.01 3350,-104.01
  text "FLS DATA FORMATTER" at 2010,3300 h36
  text "M2FS: MICHIGAN MAGELLAN FIBER SPECTROGRAPH" at 370,3295 h36
  text "1V2" at 887,3215 h40
  text "1V8" at 1423,3215 h40
  text "2V5" at 1930,3215 h40
  text "GND" at 525,3205 h40
  text "PDWN" at 3145,3195 h36 r270
  text "DTP" at 3250,3195 h36 r270
  text "PLL_B" at 3070,3190 h36 r270
  text "IO7" at 2585,3135 h36
  text "IO9" at 2720,3135 h36
  text "EOS_B" at 2630,3030 h36
  text "CAM_CLKA" at 455,2580 h25 r270
  text "1" at 1318.12,2549.12 h45
  text "1" at 1848,2544 h45
  text "1" at 2358,2544 h45
  text "CAM_D11" at 173,2459.61 h36
  text "CCA" at 755,2460 h36
  text "GND" at 755,2365 h36
  text "CAM_D10" at 173,2362.61 h36
  text "CAM_FLD" at 460,2295 h25 r270
  text "CAM_D9" at 173,2262.61 h36
  text "SDA" at 760,2260 h36
  text "CARNEGIE INSTITUTION FOR SCIENCE" at 970,2250 h40
  text "LVDS CH 8" at 2125,2175 h36
  text "CAM_D8" at 173,2163.61 h36
  text "SCL" at 755,2160 h36
  text "7" at 2410,2075 h36
  text "CAM_D7" at 173,2068.61 h36
  text "CAM_FLD" at 755,2065 h36
  text "6" at 2410,1975 h36
  text "CAM_D6" at 173,1967.61 h36
  text "CMOS_OE" at 760,1960 h36
  text "5" at 2410,1875 h36
  text "CAM_D5" at 173,1864.61 h36
  text "GND" at 758,1860 h36
  text "CAM_IO" at 732,1763 h36
  text "CAM_D4" at 173,1760.61 h36
  text "CAM_IO" at 732,1669 h36
  text "CAM_D3" at 173,1662.61 h36
  text "4" at 2410,1625 h36
  text "GND" at 760,1585 h36
  text "CAM_D2" at 173,1563.61 h36
  text "3" at 2410,1525 h36
  text "CAM_D1" at 173,1463.61 h36
  text "GND" at 760,1440 h36
  text "2" at 2410,1435 h36
  text "3370 (mil)" at -240,1414.09 h60 r90
  text "5V0" at 760,1390 h36
  text "CAM_D0" at 173,1364.61 h36
  text "LVDS CH 1" at 2130,1330 h36
  text "5V0" at 173,1263.61 h36
  text "5V0" at 755,1245 h36
  text "CAM_PCLK" at 165,1165 h36
  text "GND" at 755,1160 h36
  text "CAM_HS" at 165,1065 h36
  text "CAM_D" at 735,1050 h36
  text "DGND" at 410,1045 h60
  text "CAM_D" at 735,995 h36
  text "CAM_VS" at 170,960 h36
  text "GND" at 732,862 h36
  text "GND" at 170,860 h36
  text "1V2_VCCD" at 290,850 h45
  text "2V5_VCCA" at 1475,625 h45
  text "Vs" at 995,510 h50
  text "PLL_A" at 3070,440 h36 r270
  text "PDWN" at 3140,410 h36 r270
  text "DTP" at 3250,375 h36 r270
  text "EOS_A" at 2645,350 h36
  text "V17" at 2590,285 h36
  text "T18" at 2715,285 h36
  text "Hs" at 170,235 h50
  text "-alanb Rev 1.2" at 2575,60 h36
  text "AGND" at 30,45 h60
  text "3350 (mil)" at 1404.09,-150 h60
Bottom Overlay:
  lines w6: 370,125 370,135 ; 420,125 420,135 ; 615,125 615,135 ; 665,125 665,135 ; 890,125 890,135 ; 940,125 940,135 ; 1140,125 1140,135 ; 1190,125 1190,135 ; 1855,1540 1860,1540
  lines w10: 751,624 cw(c754.3,627.65) 751.84,623.39 ; 1002,1300 cw(c1005.3,1303.65) 1002.84,1299.39 ; 1932,1931 cw(c1935.3,1934.65) 1932.84,1930.39 ; 220,495 ccw(c223.28,498.67) 219.98,495.02 ; 612.02,764.98 ccw(c615.3,768.65) 612,765
  text "1V2" at 250,3240 h60
  text "D" at 2985,2525 h75
  text "LVDS CH 8" at 2435,2175 h36
  text "7" at 2435,2075 h36
  text "6" at 2435,1975 h36
  text "C" at 2985,1970 h75
  text "5" at 2435,1875 h36
  text "4" at 2435,1625 h36
  text "3" at 2435,1525 h36
  text "2" at 2435,1435 h36
  text "B" at 2985,1420 h75
  text "LVDS CH 1" at 2430,1330 h36
  text "A" at 2985,880 h75

## Text inside footprints (layer, text, board x,y; h text height)
J4: Bottom Overlay "GND" at 590,305 h15; Bottom Overlay "DATA" at 495,305 h15; Bottom Overlay "GND" at 490,205 h15; Bottom Overlay "VCC" at 585,205 h15
J5: Bottom Overlay "GND" at 1110,310 h15; Bottom Overlay "DATA" at 1015,310 h15; Bottom Overlay "VCC" at 1110,205 h15; Bottom Overlay "GND" at 1010,205 h15
P1: Top Overlay "2" at 815,2765 h50; Top Overlay "1" at 820,2870 h50; Top Overlay "9" at 35,2870 h50; Top Overlay "10" at 25,2765 h50